# Altium PCB PCB1.PcbDoc
Units mil, origin at the board's own origin, x right, y up, seen from the top; angles counter-clockwise.
Board outline 2540 x 2710 mil, 2 copper layers (Top Layer, Bottom Layer); 47 components, 34 nets, 122 pads, 0 vias.
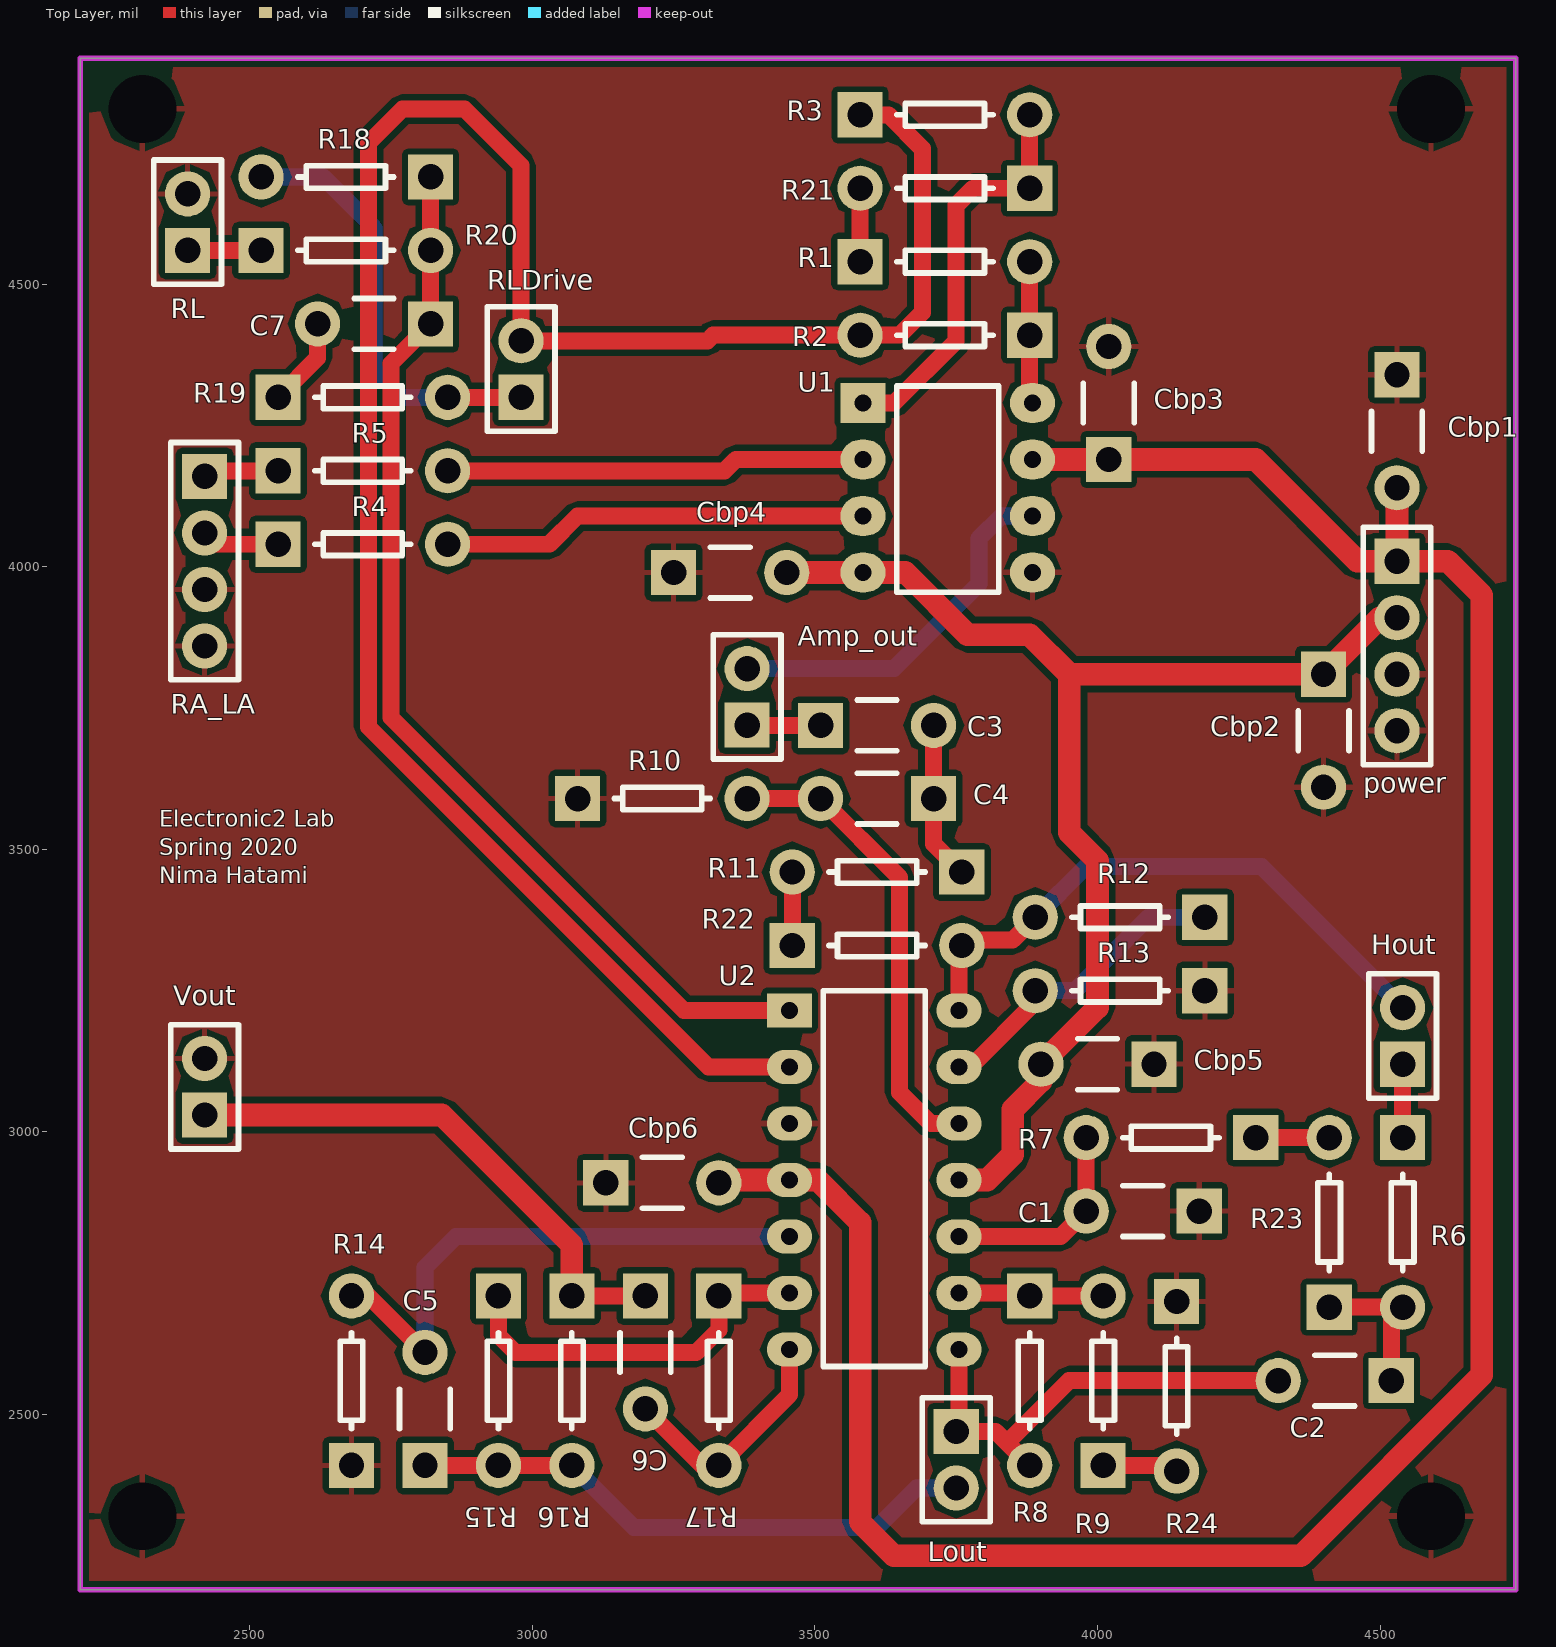
[diagram p0: Top Layer view]
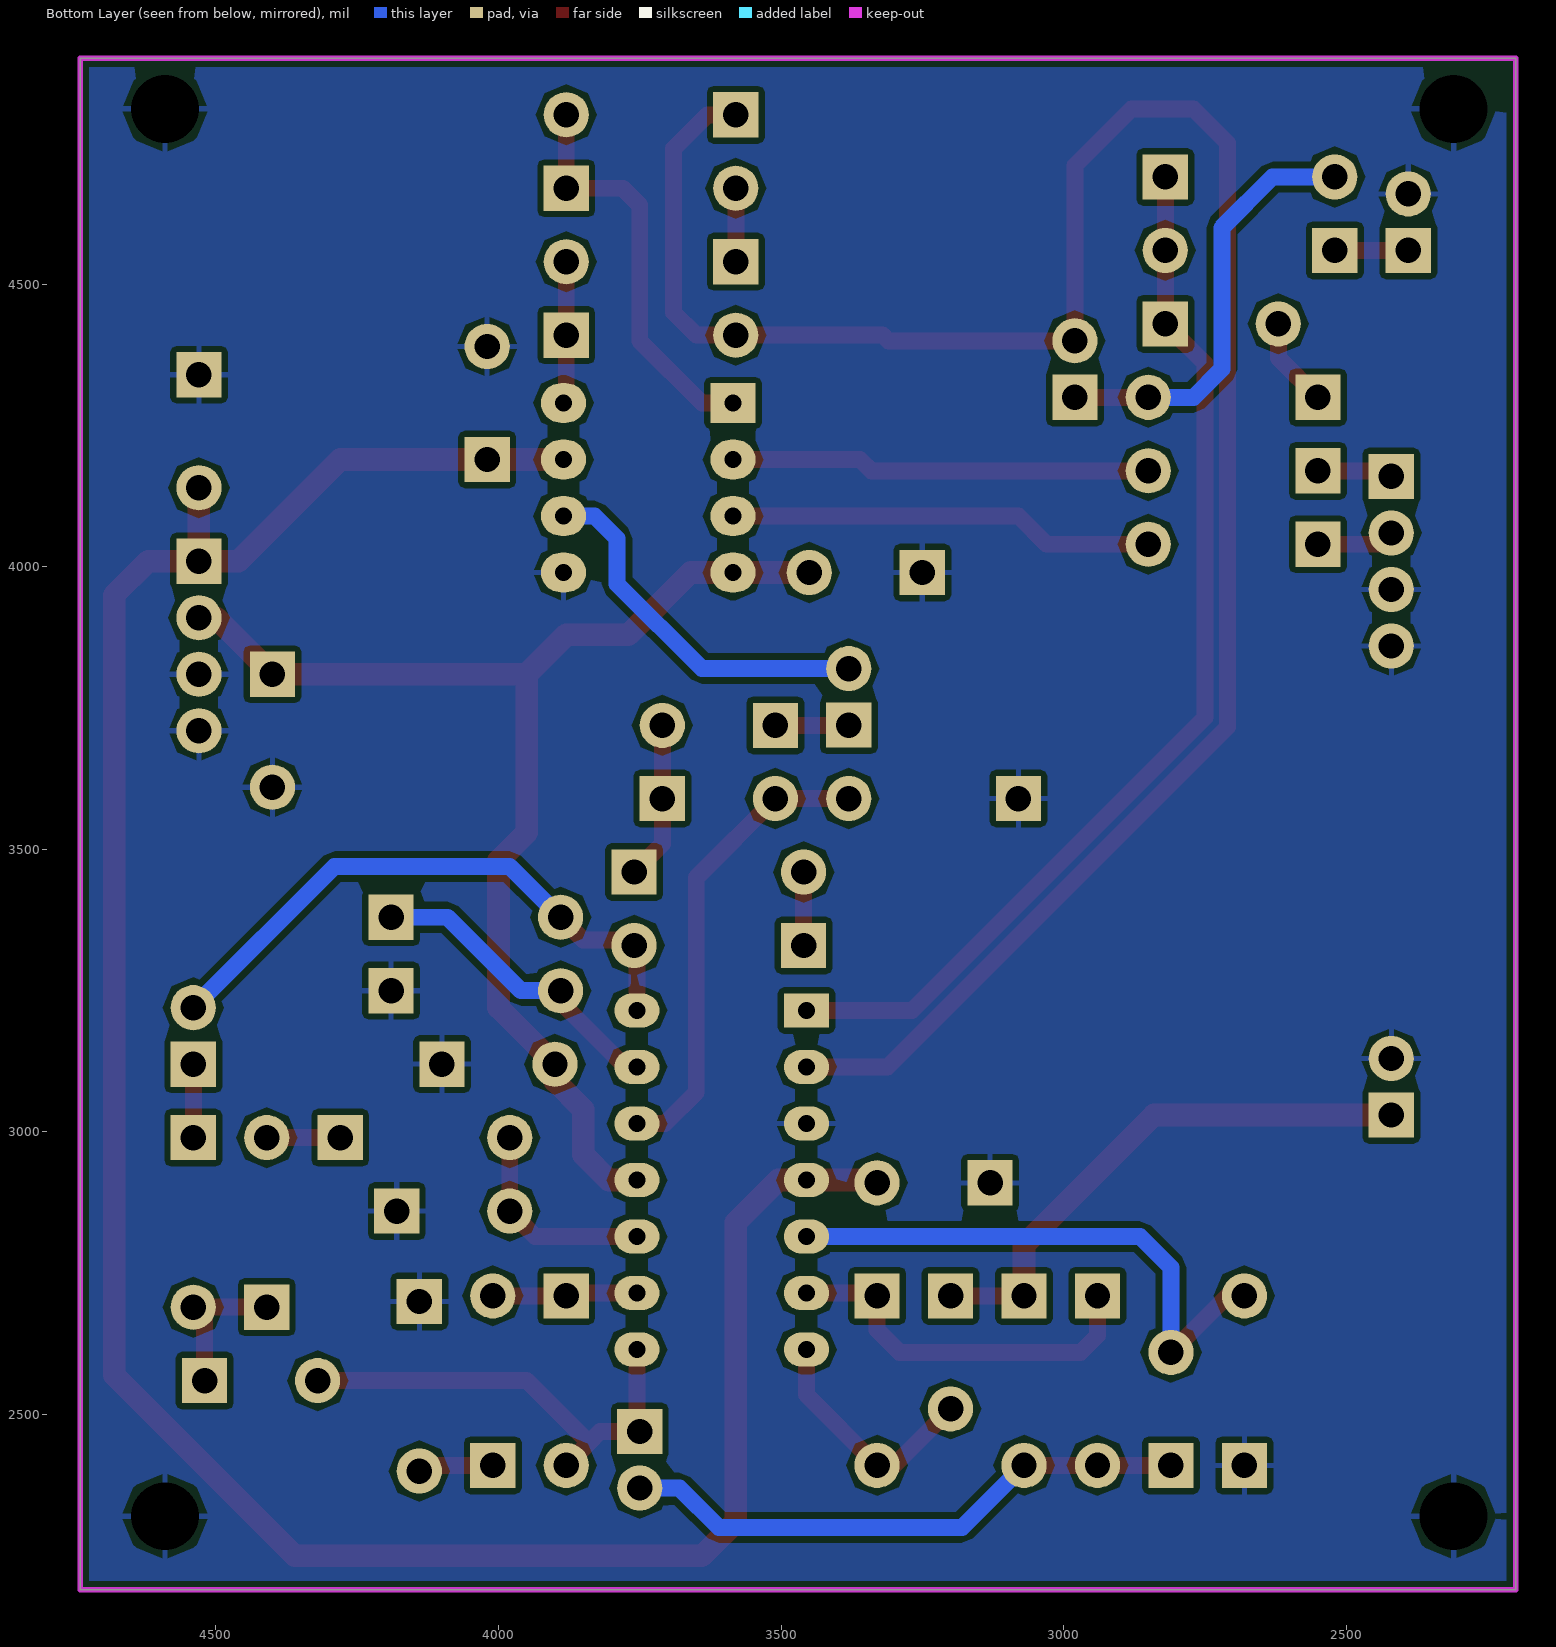
[diagram p1: Bottom Layer view, seen from below]

## Layer stack, top to bottom
Top Solder: solder mask 0.4, Solder Resist, Dk 3.5
Top Layer: signal copper 1.4
Dielectric 1: dielectric 12.6, FR-4, Dk 4.8
Bottom Layer: signal copper 1.4
Bottom Solder: solder mask 0.4, Solder Resist, Dk 3.5

## Board outline
2200,2190 4740,2190 4740,4900 2200,4900

## Design rules (kind name [scope] priority, off if disabled: settings)
Clearance [All] p1: gap=10 ignorepadtopadclearanceinfootprint=FALSE except(0: Arc-Hole Track-Hole SMDPad-Hole THPad-Hole Via-Hole Fill-Hole Poly-Hole Region-Hole Text-Hole)
HoleSize [All] p1: absolutevalues=TRUE maxlimit=120 minlimit=1 maxpercent=80.000 minpercent=20.000
PolygonConnect [All] p1: connectstyle=Relief reliefconductorwidth=10 reliefentries=4 polygonreliefangle="90 Angle" airgapwidth=10
RoutingVias [All] p1: holewidth=28 width=50 viastyle="Through Hole" minholewidth=28 minwidth=50 maxholewidth=28 maxwidth=50
SolderMaskExpansion [All] p1: expansion=4 istentingtop=FALSE
Width [All] p1: maxlimit=40 minlimit=10 preferedwidth=10 minimp=50.000000 maximp=50.000000 favimp=50.000000
29 further rules are at their usual default settings.

## Components (designator, comment, footprint, x,y, rotation, side; value= is the part's Value field where it differs from the comment)
Amp_out "port" pinheader 3380,3720 r90 top
C1 "Cap" cap 4180,2860 r180 top value=15nF
C2 "Cap" cap 4520,2560 r180 top value=2.2uF
C3 "Cap" cap 3510,3719.5 r0 top value=2.2uF
C4 "Cap" cap 3710,3590 r180 top value=6.8uF
C5 "Cap" cap 2810,2410 r90 top value=47nF
C6 "Cap" cap 3200,2710 r270 top value=47nF
C7 "Cap" cap 2820,4430 r180 top value=100nF
Cbp1 "Cap" cap 4530,4340 r270 top value=10uF
Cbp2 "Cap" cap 4400,3810 r270 top value=10uF
Cbp3 "Cap" cap 4020,4190 r90 top value=100nF
Cbp4 "Cap" cap 3250,3990 r0 top value=100nF
Cbp5 "Cap" cap 4100,3120 r180 top value=100nF
Cbp6 "Cap" cap 3130,2910 r0 top value=100nF
Hout "port" pinheader 4540,3120 r90 top
Lout "port" pinheader 3750,2470 r270 top
power "pin4" PINHEADER4 4530,4010 r270 top
R1 "Res Semi" res 3580,4540 r0 top value=12k
R2 "Res Semi" res 3880,4410 r180 top value=22k
R3 "Res Semi" res 3580,4800 r0 top value=22k
R4 "Res Semi" res 2550,4040 r0 top value=220k
R5 "Res Semi" res 2550,4170 r0 top value=220k
R6 "Res Semi" res 4540,2990 r270 top value=180k
R7 "Res Semi" res 4280,2990 r180 top value=220k
R8 "Res Semi" res 3880,2710 r270 top value=270k
R9 "Res Semi" res 4010,2410 r90 top value=22k
R10 "Res Semi" res 3080,3590 r0 top value=1.8Meg
R11 "Res Semi" res 3760,3460 r180 top value=4.7Meg
R12 "Res Semi" res 4190,3380 r180 top value=100k
R13 "Res Semi" res 4190,3250 r180 top value=10k
R14 "Res Semi" res 2680,2410 r90 top value=68k
R15 "Res Semi" res 2940,2710 r270 top value=10k
R16 "Res Semi" res 3070,2710 r270 top value=68k
R17 "Res Semi" res 3330,2710 r270 top value=10k
R18 "Res Semi" res 2820,4690 r180 top value=1Meg
R19 "Res Semi" res 2550,4300 r0 top value=10k
R20 "Res Semi" res 2520,4560 r0 top value=220k
R21 "Res Semi" res 3880,4670 r180 top value=2.7k
R22 "Res Semi" res 3460,3330 r0 top value=680k
R23 "Res Semi" res 4410,2690 r90 top value=10k
R24 "Res Semi" res 4140,2700 r270 top value=33
RA_LA "pin4" PINHEADER4 2420,4160 r270 top
RL "port" pinheader 2390,4560 r90 top
RLDrive "port" pinheader 2980,4300 r90 top
U1 "AD620" AD620 3585,4290 r0 top
U2 "TL084" TL084 3455,3215 r0 top
Vout "port" pinheader 2420,3030 r90 top

## Footprints (in the part's own frame and the unit in brackets; to place one, negate y for a bottom-side part, rotate by r counter-clockwise, add the part's x,y. Pads: shape width x height; smd on the part's side, far side on the other; paste and mask are expansions set on the pad)
AD620 [mil]
  rect 80x70 hole 30: 1(0,0)
  oval 80x70 hole 30: 2(0,-100) 3(0,-200) 4(0,-300) 5(300,-300) 6(300,-200) 7(300,-100) 8(300,0)
  round 30 on Top Overlay: 9(90,5)
  silkscreen extent 60,-335 240,30
cap [mil]
  rect 80x80 hole 45: 1(0,0)
  round 80 hole 45: 2(200,0)
  silkscreen extent 65,-45 135,45
pinheader [mil]
  rect 80x80 hole 45: 1(0,0)
  round 80 hole 45: 2(100,0)
  silkscreen extent -60,-60 160,60
PINHEADER4 [mil]
  rect 80x80 hole 45: 1(0,0)
  round 80 hole 45: 2(100,0) 3(200,0) 4(300,0)
  silkscreen extent -60,-60 360,60
res [mil]
  rect 80x80 hole 45: 1(0,0)
  round 80 hole 45: 2(300,0)
  silkscreen extent 65,-20 235,20
TL084 [mil]
  rect 80x60 hole 30: 1(0,0)
  oval 80x60 hole 30: 2(0,-100) 3(0,-200) 4(0,-300) 5(0,-400) 6(0,-500) 7(0,-600) 8(300,-600) 9(300,-500) 10(300,-400) 11(300,-300) 12(300,-200) 13(300,-100) 14(300,0)
  round 30 on Top Overlay: 15(95,0)
  silkscreen extent 60,-630 240,35

## Part data
C1 C2 C3 C4 C5 C6 C7 Cbp1 Cbp2 Cbp3 Cbp4 Cbp5 Cbp6: "Capacitor", LatestRevisionDate=17-Jul-2002, LatestRevisionNote="Re-released for DXP Platform.", PackageDescription="Radial Cap, Thru-Hole; 2 Leads; 0.3 in Pin Spacing", PackageReference=RAD-0.3, Published=8-Jun-2000, Publisher="Altium Limited"
R1 R2 R3 R4 R5 R6 R7 R8 R9 R10 R11 R12 R13 R14 R15 R16 R17 R18 R19 R20 R21 R22 R23 R24: "Semiconductor Resistor", LatestRevisionDate=17-Jul-2002, LatestRevisionNote="Re-released for DXP Platform.", PackageDescription="Axial Device, Thru-Hole; 2 Leads; 0.5 in Pin Spacing", PackageReference=AXIAL-0.5, Published=8-Jun-2000, Publisher="Altium Limited"

## Free pads (board coordinates)
  round 80 hole 120: 1(2310,4810) 2(4590,4810) 3(4590,2320) 4(2310,2320)

## Nets (pads, with @x,y where several pads share a name; then routed paths per layer and width w, separated by ;. In a path a pad name is that pad's centre, name@x,y a point inside that pad or via, vN(x,y) a via of type N, cw(c..) or ccw(c..) an arc to the next point about the centre after c; other vN are vias at no path point)
GND: C1.1 Cbp1.1 Cbp2.2 Cbp3.2 Cbp4.1 Cbp5.1 Cbp6.1 pad.1 pad.2 pad.3 pad.4 power.3 power.4 R10.1 R13.1 R14.1 R24.1 RA_LA.3 RA_LA.4 RL.2 U1.5 U2.3 Vout.2
LeftA: R4.1 RA_LA.2 | length 138.3
  Top Layer w30: RA_LA.2 2440,4040 R4.1
NetAmp_out_1: Amp_out.1 C3.1 | length 130.2
  Top Layer w30: Amp_out.1 3380.5,3719.5 C3.1
NetAmp_out_2: Amp_out.2 U1.6 | length 663.7
  Bottom Layer w30: Amp_out.2 3640,3820 3790,3970 3790,4050 3830,4090 U1.6
NetC1_2: C1.2 R7.2 U2.10 | length 373.6
  Top Layer w30: U2.10 3935,2815 C1.2 R7.2
NetC2_1: C2.1 R6.2 R23.1 | length 268.3
  Top Layer w30: R23.1 R6.2 4520,2670 C2.1
NetC2_2: C2.2 Lout.1 R8.2 U2.8 | length 827.5
  Top Layer w30: U2.8 3755,2475 Lout.1 3820,2470 3840,2450 ; R8.2 3840,2450 ; C2.2 3950,2560 3840,2450
NetC3_2: C3.2 C4.1 R11.1 | length 280.2
  Top Layer w30: C3.2 C4.1 3710,3510 R11.1
NetC4_2: C4.2 R10.2 U2.12 | length 835.8
  Top Layer w30: R10.2 C4.2 3650,3450 3650,3070 3705,3015 U2.12
NetC5_1: C5.1 Lout.2 R15.2 R16.2 | length 1014.6
  Top Layer w30: C5.1 R15.2 R16.2
  Bottom Layer w30: R16.2 3180,2300 3610,2300 3680,2370 Lout.2
NetC5_2: C5.2 R14.2 U2.5 | length 989.2
  Top Layer w30: R14.2 2710,2710 C5.2
  Bottom Layer w30: C5.2 2810,2760 2865,2815 U2.5
NetC6_2: C6.2 R17.2 U2.7 | length 428.2
  Top Layer w30: C6.2 3300,2410 R17.2 3455,2535 U2.7
NetC7_1: C7.1 R18.1 R20.2 U2.1 | length 1905.3
  Top Layer w30: R18.1 R20.2 C7.1 2750,4360 2750,3733.43 3268.43,3215 U2.1
NetC7_2: C7.2 R19.1 | length 159
  Top Layer w30: R19.1 2620,4370 C7.2
NetHout_1: Hout.1 R6.1 | length 130
  Top Layer w30: R6.1 Hout.1
NetHout_2: Hout.2 R12.2 R22.2 U2.14 | length 1058.6
  Top Layer w30: U2.14 3755,3325 R22.2 3770,3340 3850,3340 R12.2
  Bottom Layer w30: R12.2 3980,3470 4290,3470 Hout.2
NetR1_1: R1.1 R21.2 | length 130
  Top Layer w30: R1.1 R21.2
NetR1_2: R1.2 R2.1 U1.8 | length 252.1
  Top Layer w30: R1.2 R2.1 3880,4295 U1.8
NetR2_2: R2.2 R3.1 RLDrive.2 U2.2 | length 3829.3
  Top Layer w30: U2.2 3311.86,3115 2710,3716.86 2710,4750 2770,4810 2880,4810 2980,4710 RLDrive.2 3310,4400 3320,4410 R2.2 3650,4410 3690,4450 3690,4740 3630,4800 R3.1
NetR3_2: R3.2 R21.1 U1.1 | length 723
  Top Layer w30: U1.1 3640,4290 3750,4400 3750,4640 3780,4670 R21.1 R3.2
NetR4_2: R4.2 U1.3 | length 755.7
  Top Layer w30: R4.2 3030,4040 3080,4090 U1.3
NetR5_2: R5.2 U1.2 | length 743.3
  Top Layer w30: R5.2 3340,4170 3360,4190 U1.2
NetR7_1: R7.1 R23.2 | length 130
  Top Layer w30: R7.1 R23.2
NetR8_1: R8.1 R9.2 U2.9 | length 257.1
  Top Layer w30: U2.9 3875,2715 R8.1 R9.2
NetR9_1: R9.1 R24.2 | length 134.1
  Top Layer w30: R9.1 4130,2410 R24.2
NetR11_2: R11.2 R22.1 | length 130
  Top Layer w30: R22.1 R11.2
NetR12_1: R12.1 R13.2 U2.13 | length 556.5
  Top Layer w30: U2.13 3775,3115 3890,3230 R13.2
  Bottom Layer w30: R13.2 3960,3250 4090,3380 R12.1
NetR15_1: R15.1 R17.1 U2.6 | length 676.1
  Top Layer w30: R15.1 2940,2640 2970,2610 3290,2610 3330,2650 R17.1 3335,2715 U2.6
NetR18_2: R18.2 R19.2 RLDrive.1 | length 768
  Top Layer w30: R19.2 RLDrive.1
  Bottom Layer w30: R18.2@2540,4690 2630,4690 2720,4600 2720,4350 2770,4300 R19.2
  Bottom Layer w40: R18.2 R18.2@2540,4690
Nout: C6.1 R16.1 Vout.1 | length 965.3
  Top Layer w30: R16.1 C6.1
  Top Layer w40: Vout.1 2840,3030 3070,2800 R16.1
RightA: R5.1 RA_LA.1 | length 134.1
  Top Layer w30: RA_LA.1 2430,4170 R5.1
RightL: R20.1 RL.1 | length 130
  Top Layer w30: RL.1 R20.1
VCC: Cbp1.2 Cbp3.1 Cbp6.2 power.1 U1.7 U2.4 | length 4474.9
  Top Layer w40: Cbp6.2 3335,2915 U2.4 3505,2915 3580,2840 3580,2310 3640,2250 4360,2250 4680,2570 4680,3950 4620,4010 power.1 ; U1.7 Cbp3.1 4280,4190 4460,4010 power.1 ; Cbp1.2 power.1
VEE: Cbp2.1 Cbp4.2 Cbp5.2 power.2 U1.4 U2.11 | length 2242.5
  Top Layer w40: Cbp4.2 U1.4 3660,3990 3770,3880 3880,3880 3950,3810 ; U2.11 3805,2915 3850,2960 3850,3040 3900,3090 Cbp5.2 4000,3220 4000,3480 3950,3530 3950,3810 ; power.2 4500,3910 Cbp2.1 3950,3810
pads on no net: U1.9 U2.15

## Polygon pours and split planes (outlines as drawn)
GND on Bottom Layer "Bottom Layer-GND" (solid, remove dead copper, pour order 2): 2200,4900 4740,4900 4740,2190 2200,2190
GND on Top Layer "Top Layer-GND" (solid, remove dead copper, pour order 0): 2200,4900 4740,4900 4740,2190 2200,2190

## Keep-outs
Keep-Out Layer:
  lines w10: 2200,2190 2210,2190 4740,2190 4740,4900 4690,4900 2200,4900 2200,2190

## Silkscreen, mask and mechanical layers (free items; w line width, h text height)
Top Overlay:
  text "Electronic2 Lab / Spring 2020 / Nima Hatami" at 2340,3430 h50